# Altium PCB connecter.PcbDoc
Units mil, origin at the board's own origin, x right, y up, seen from the top; angles counter-clockwise.
Board outline 2514.83 x 777.95 mil, 2 copper layers (Top Layer, Bottom Layer); 18 components, 28 nets, 225 pads, 21 vias.
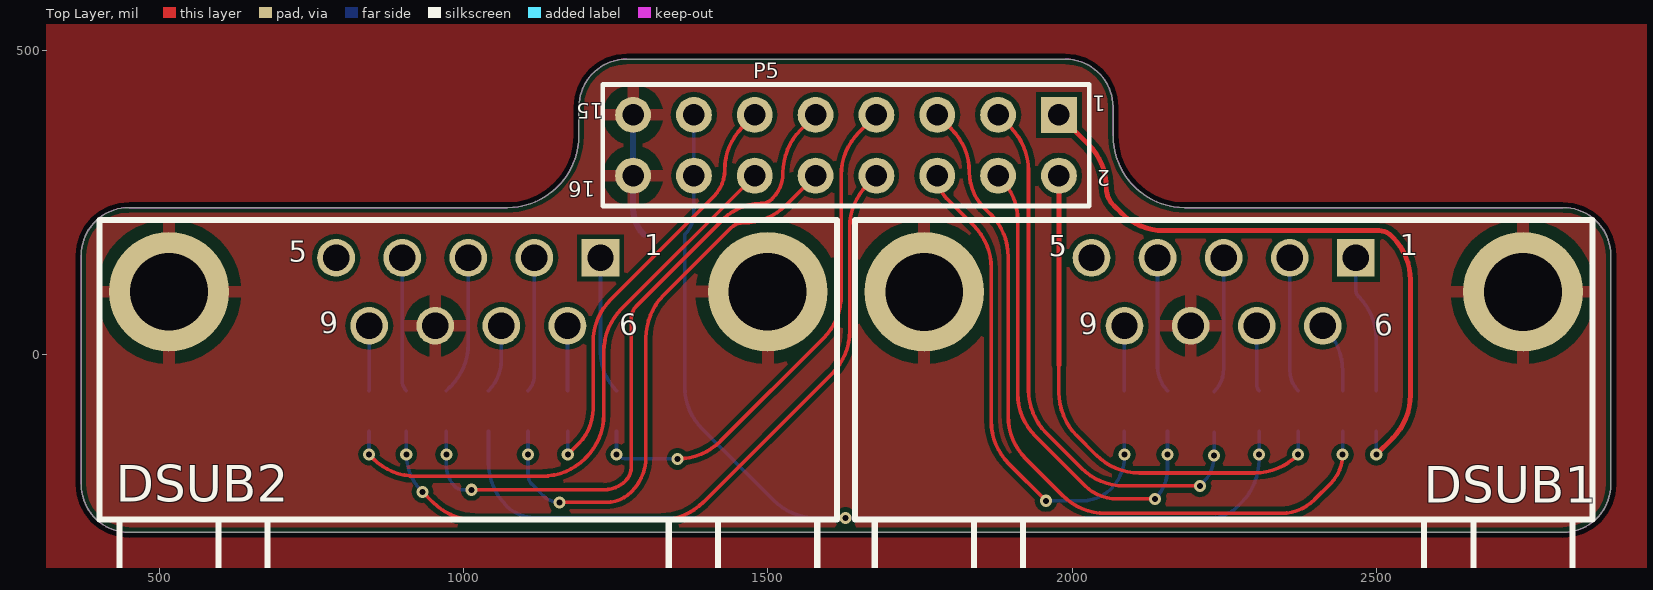
[diagram p0: Top Layer view]
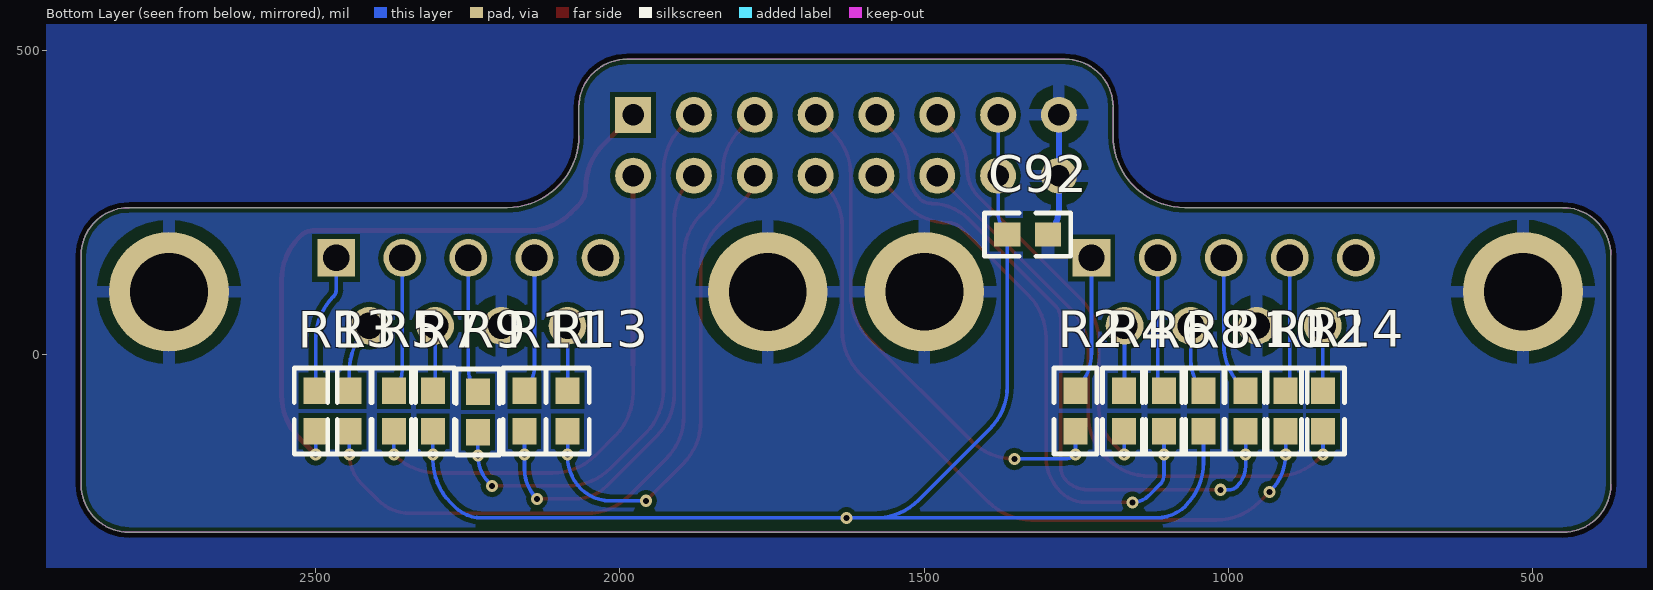
[diagram p1: Bottom Layer view, seen from below]

## Layer stack, top to bottom
Top Solder: solder mask 0.4, Solder Resist, Dk 3.5
Top Layer: signal copper 1.4
Dielectric1: dielectric 12.6, FR-4, Dk 4.8
Bottom Layer: signal copper 1.4
Bottom Solder: solder mask 0.4, Solder Resist, Dk 3.5

## Board outline
371.02,-213.78 ccw(c449.76,-213.78) 449.76,-292.52 2807.1,-292.52 ccw(c2807.1,-213.78) 2885.84,-213.78 2885.84,162.72 ccw(c2807.1,162.72) 2807.1,241.46 2185.6,241.46 cw(c2185.6,359.57) 2067.49,359.57 2067.49,406.69 ccw(c1988.75,406.69) 1988.75,485.43 1268.11,485.43 ccw(c1268.11,406.69) 1189.37,406.69 1189.37,359.57 cw(c1071.26,359.57) 1071.26,241.46 449.76,241.46 ccw(c449.76,162.72) 371.02,162.72

## Design rules (kind name [scope] priority, off if disabled: settings)
Clearance footprint [(HasFootprint('LQFP-32_L7.0-W7.0-P0.80-LS9.0-TL') OR HasFootprint('TF1') OR HasFootprint('LQFP64-10-05') OR HasFootprint('USB-C-16PIN'))] p1: gap=5
Clearance [All] p2: gap=8
ComponentClearance [All] p1: gap=0 collisioncheckmode=3 verticalgap=0 showdistances=FALSE
DiffPairsRouting [All] p1: maxlimit=10 minlimit=10 mostfreqgap=10 toplayer_minwidth=7 toplayer_maxwidth=15 toplayer_prefwidth=7 bottomlayer_minwidth=7 bottomlayer_maxwidth=15 bottomlayer_prefwidth=7 maxuncoupledlength=500
FabricationTestPointUsage TestPointUsage [All] p1: valid=0 allowmultiple=FALSE
FabricationTestpoint Testpoint [All] p1: side=3 testpointundercomponent=TRUE minsize=40 maxsize=100 preferedsize=60 minholesize=0 maxholesize=40 preferedholesize=32 testpointgrid=1 allowsidetop=TRUE allowsidebottom=TRUE usegrid=TRUE gridtolerance=0.01
HoleSize [All] p1: absolutevalues=TRUE maxlimit=157.48 minlimit=10 maxpercent=80.000 minpercent=20.000
PlaneClearance [All] p1: clearance=5
PlaneConnect [All] p1: planeconnectstyle=Relief reliefexpansion=3 reliefentries=4 reliefconductorwidth=20 reliefairgap=2
PolygonConnect [All] p1: connectstyle=Relief reliefconductorwidth=20 reliefentries=4 polygonreliefangle="90 Angle" airgapwidth=20
RoutingVias [All] p1: holewidth=11.81 width=23.62 viastyle="Through Hole" minholewidth=12 minwidth=24 maxholewidth=39.37 maxwidth=78.74
SilkToSilkClearance [All] p1: silktosilkclearance=0
SilkToSolderMaskClearance [IsPad] p1: minsilkscreentomaskgap=0 clearancetoexposedcopper=TRUE
SolderMaskExpansion [All] p1: expansion=4
Width [All] p1: maxlimit=118.11 minlimit=6 preferedwidth=8
21 further rules are at their usual default settings.

## Components (designator, comment, footprint, x,y, rotation, side; value= is the part's Value field where it differs from the comment)
C92 "0603" 0603 1363.17,196.8 r180 bottom
DSUB1 "DMR-9S" DSUB-TH_DMR-9S 2249.27,102.78 r270 top locked
DSUB2 "DMR-9S" DSUB-TH_DMR-9S 1007.5,102.92 r270 top locked
P5 "Header 8X2" HDR2X8 1978.43,393.77 r180 top locked
R1 "0603" 0603 2500.2,-59.62 r270 bottom
R2 "0603" 0603 1251.09,-59.62 r270 bottom
R3 "0603" 0603 2444.83,-59.62 r270 bottom
R4 "0603" 0603 1171.09,-59.62 r270 bottom
R5 "0603" 0603 2371.74,-59.62 r270 bottom
R6 "0603" 0603 1105.61,-59.62 r270 bottom
R7 "0603" 0603 2307.51,-59.62 r270 bottom
R8 "0603" 0603 1040.82,-59.62 r270 bottom
R9 "0603" 0603 2233.61,-61.19 r270 bottom
R10 "0603" 0603 971.48,-59.62 r270 bottom
R11 "0603" 0603 2156.91,-59.62 r270 bottom
R12 "0603" 0603 905.59,-59.62 r270 bottom
R13 "0603" 0603 2086.04,-59.62 r270 bottom
R14 "0603" 0603 844.34,-59.62 r270 bottom

## Footprints (in the part's own frame and the unit in brackets; to place one, negate y for a bottom-side part, rotate by r counter-clockwise, add the part's x,y. Pads: shape width x height; smd on the part's side, far side on the other; paste and mask are expansions set on the pad)
0603 [mm]
  rect 1.1x1 smd: 1(0,0) 2(1.7,0)
  silkscreen extent -0.95,-0.9 2.65,0.9
DSUB-TH_DMR-9S [mil]
  rect 62x62 hole 43.31: 1(-55.9,217.32)
  round 62 hole 43.31: 2(-55.9,108.66) 3(-55.9,0) 4(-55.9,-108.66) 5(-55.9,-217.32) 6(55.9,162.99) 7(55.9,54.33) 8(55.9,-54.33) 9(55.9,-162.99)
  round 196.85 hole 127.95: 10(-0.01,492.12) 11(-0.01,-492.12)
  silkscreen extent -118,-606 610,606
HDR2X8 [mm] "Connector; Header; 8x2 Position"
  rect 1.5x1.5 hole 0.9: 1(0,0)
  round 1.5 hole 0.9: 2(0,2.54) 3(2.54,0) 4(2.54,2.54) 5(5.08,0) 6(5.08,2.54) 7(7.62,0) 8(7.62,2.54) 9(10.16,0) 10(10.16,2.54) 11(12.7,0) 12(12.7,2.54) 13(15.24,0) 14(15.24,2.54) 15(17.78,0) 16(17.78,2.54)
  silkscreen extent -1.27,-1.27 19.05,3.81

## Part data
C92: library part CAP_0603, "0603 footprint non-polorised capacitor"
P5: "Header, 8-Pin, Dual row"
R1 R2 R3 R4 R5 R6 R7 R8 R9 R10 R11 R12 R13 R14: library part RES_0603, "0603 footprint resistor"

## Free pads (board coordinates)
  round 60.04 on Mech4: 1(515.41,72.97) 1(515.41,133.01) 1(1499.66,72.97) 1(1499.66,133.01) 1(1757.2,72.97) 1(1757.2,133.01) 1(2741.45,72.97) 1(2741.45,133.01)
  round 127.95 on Mech14: 1(515.41,102.99) 1(1499.66,102.99) 1(1757.2,102.99) 1(2741.45,102.99)
  round 196.85 on Mech2: 1(515.41,102.99) 1(1499.66,102.99) 1(1757.2,102.99) 1(2741.45,102.99)
  round 196.85 on Mech3: 1(515.41,102.99) 1(1499.66,102.99) 1(1757.2,102.99) 1(2741.45,102.99)
  round 204.85 on Mech16: 1(515.41,102.99) 1(515.41,102.99) 1(1499.66,102.99) 1(1499.66,102.99) 1(1757.2,102.99) 1(1757.2,102.99) 1(2741.45,102.99) 1(2741.45,102.99)
  round 196.85 on Mech15: 1(515.41,102.99) 1(1499.66,102.99) 1(1757.2,102.99) 1(2741.45,102.99)
  round 120.08 on Mech4: 1(515.41,102.99) 1(1499.66,102.99) 1(1757.2,102.99) 1(2741.45,102.99)
  round 43.31 on Mech14: 1(790.21,158.89) 1(844.54,47.08) 1(898.87,158.89) 1(953.2,47.08) 1(1007.53,158.89) 1(1061.86,47.08) 1(1116.19,158.89) 1(1170.52,47.08) 1(1224.85,158.89) 1(2032,158.89) 1(2086.33,47.08) 1(2140.66,158.89) 1(2194.99,47.08) 1(2249.32,158.89) 1(2303.65,47.08) 1(2357.98,158.89) 1(2412.31,47.08) 1(2466.64,158.89)
  round 62 on Mech2: 1(790.21,158.89) 1(844.54,47.08) 1(898.87,158.89) 1(953.2,47.08) 1(1007.53,158.89) 1(1061.86,47.08) 1(1116.19,158.89) 1(1170.52,47.08) 1(2032,158.89) 1(2086.33,47.08) 1(2140.66,158.89) 1(2194.99,47.08) 1(2249.32,158.89) 1(2303.65,47.08) 1(2357.98,158.89) 1(2412.31,47.08)
  round 62 on Mech3: 1(790.21,158.89) 1(844.54,47.08) 1(898.87,158.89) 1(953.2,47.08) 1(1007.53,158.89) 1(1061.86,47.08) 1(1116.19,158.89) 1(1170.52,47.08) 1(2032,158.89) 1(2086.33,47.08) 1(2140.66,158.89) 1(2194.99,47.08) 1(2249.32,158.89) 1(2303.65,47.08) 1(2357.98,158.89) 1(2412.31,47.08)
  round 70 on Mech16: 1(790.21,158.89) 1(790.21,158.89) 1(844.54,47.08) 1(844.54,47.08) 1(898.87,158.89) 1(898.87,158.89) 1(953.2,47.08) 1(953.2,47.08) 1(1007.53,158.89) 1(1007.53,158.89) 1(1061.86,47.08) 1(1061.86,47.08) 1(1116.19,158.89) 1(1116.19,158.89) 1(1170.52,47.08) 1(1170.52,47.08) 1(2032,158.89) 1(2032,158.89) 1(2086.33,47.08) 1(2086.33,47.08) 1(2140.66,158.89) 1(2140.66,158.89) 1(2194.99,47.08) 1(2194.99,47.08) 1(2249.32,158.89) 1(2249.32,158.89) 1(2303.65,47.08) 1(2303.65,47.08) 1(2357.98,158.89) 1(2357.98,158.89) 1(2412.31,47.08) 1(2412.31,47.08)
  round 62 on Mech15: 1(790.21,158.89) 1(844.54,47.08) 1(898.87,158.89) 1(953.2,47.08) 1(1007.53,158.89) 1(1061.86,47.08) 1(1116.19,158.89) 1(1170.52,47.08) 1(2032,158.89) 1(2086.33,47.08) 1(2140.66,158.89) 1(2194.99,47.08) 1(2249.32,158.89) 1(2303.65,47.08) 1(2357.98,158.89) 1(2412.31,47.08)
  round 35.44 on Mech4: 1(790.21,158.89) 1(844.54,47.08) 1(898.87,158.89) 1(953.2,47.08) 1(1007.53,158.89) 1(1061.86,47.08) 1(1116.19,158.89) 1(1170.52,47.08) 1(1224.85,158.89) 1(2032,158.89) 1(2086.33,47.08) 1(2140.66,158.89) 1(2194.99,47.08) 1(2249.32,158.89) 1(2303.65,47.08) 1(2357.98,158.89) 1(2412.31,47.08) 1(2466.64,158.89)
  round 2.36 on Mech5: 1(1618.83,224.92) 1(1618.83,227.28) 1(2860.62,224.92) 1(2860.62,227.28)
  round 0.5 on Mech14: 1(1894.85,-41.38)

## Via types
v1: diameter 20, hole 10, Top Layer to Bottom Layer, 21 vias

## Nets (pads, with @x,y where several pads share a name; then routed paths per layer and width w, separated by ;. In a path a pad name is that pad's centre, name@x,y a point inside that pad or via, vN(x,y) a via of type N, cw(c..) or ccw(c..) an arc to the next point about the centre after c; other vN are vias at no path point)
GND: C92.2 DSUB1.8 DSUB1.10 DSUB1.11 DSUB2.8 DSUB2.10 DSUB2.11 P5.15 P5.16 | length 201.7
  Bottom Layer w10: P5.15 P5.16 1278.43,239.79 ccw(c1339.23,239.79) C92.2
JOY0_BTN1: P5.11 R4.2 | length 710
  Top Layer w6: v1(1171.09,-164.53) 1188.73,-146.89 ccw(c1130.98,-89.14) 1212.65,-89.14 1212.65,19.98 cw(c1312.65,19.98) 1241.94,90.69 1411.32,260.06 ccw(c1368.34,303.04) 1429.12,303.04 cw(c1529.12,303.04) 1458.41,373.75 P5.11
  Bottom Layer w6: v1@1170.65,-165.59 ccw(c1169.6,-164.53) v1(1171.09,-164.53) R4.2
JOY0_BTN2: P5.12 R14.2 | length 983.1
  Top Layer w6: v1(844.34,-164.53) 850.79,-170.97 ccw(c921.5,-100.26) 921.5,-200.26 1128.8,-200.26 ccw(c1128.8,-100.26) 1199.51,-170.97 1200.95,-169.54 ccw(c1130.24,-98.83) 1230.24,-98.83 1230.24,4.16 cw(c1330.24,4.16) 1259.52,74.87 P5.12
  Bottom Layer w6: v1(844.34,-164.53) R14.2
JOY0_DOWN: P5.10 R6.2 | length 930.8
  Top Layer w6: v1(1157.46,-243.27) 1233.97,-243.27 ccw(c1233.97,-184.27) 1275.69,-225.99 ccw(c1218.17,-168.47) 1299.51,-168.47 1299.51,26.86 cw(c1399.51,26.86) 1328.8,97.57 1439.03,207.79 cw(c1459.52,187.3) 1459.52,216.28 ccw(c1459.52,316.28) 1530.23,245.57 P5.10
  Bottom Layer w6: R6.2 v1(1105.61,-164.53) 1105.61,-198.43 ccw(c1126.47,-198.43) 1111.72,-213.19 1130.73,-232.2 ccw(c1157.46,-205.47) v1(1157.46,-243.27)
JOY0_LEFT: P5.9 R10.2 | length 1124.4
  Top Layer w6: v1(1012.85,-222.59) 1013.18,-222.27 1166.16,-222.27 1166.48,-222.59 1230.17,-222.59 ccw(c1230.17,-171.56) 1266.25,-207.65 ccw(c1244.12,-185.51) 1275.42,-185.51 1275.42,58.92 cw(c1304.49,58.92) 1283.93,79.48 1427.04,222.59 cw(c1488.46,161.17) 1488.46,248.03 ccw(c1488.46,274.13) 1506.92,255.67 ccw(c1463.96,298.64) 1524.72,298.64 cw(c1624.72,298.64) 1554.01,369.35 P5.9
  Bottom Layer w6: R10.2 v1(971.48,-164.53) 971.48,-182.89 ccw(c1019.9,-182.89) 985.66,-217.12 ccw(c998.86,-203.93) 998.86,-222.59 v1(1012.85,-222.59)
JOY0_RIGHT: P5.8 R12.2 | length 1237.2
  Top Layer w6: v1(932.17,-225.94) 949.09,-242.86 ccw(c1019.81,-172.15) 975.55,-261.82 ccw(c1019.81,-172.15) 980.89,-264.27 ccw(c1019.81,-172.15) 1019.81,-272.15 1323.37,-272.15 ccw(c1323.37,-172.15) 1394.08,-242.86 1605.29,-31.65 ccw(c1534.58,39.06) 1634.58,39.06 1634.58,208.5 cw(c1734.58,208.5) 1663.87,279.21 P5.8
  Bottom Layer w6: R12.2 v1(905.59,-164.53) ccw(c989.66,-164.53) 930.21,-223.98 v1(932.17,-225.94)
JOY0_UP: P5.7 R2.2 | length 852.6
  Top Layer w6: v1(1351.57,-171.7) ccw(c1351.57,-71.7) 1422.28,-142.41 1591.29,26.6 ccw(c1520.58,97.31) 1620.58,97.31 1620.58,294.5 cw(c1720.58,294.5) 1649.87,365.21 P5.7
  Bottom Layer w6: R2.2 v1(1251.09,-164.53) ccw(c1268.39,-147.22) 1268.39,-171.7 v1(1351.57,-171.7)
JOY1_BTN1: P5.5 R3.2 | length 1251.1
  Top Layer w6: P5.5 1801.81,370.39 cw(c1731.1,299.68) 1831.1,299.68 ccw(c1913.67,299.68) 1855.28,241.29 1865.72,230.86 cw(c1795.01,160.15) 1895.01,160.15 1895.01,-101.15 ccw(c1995.01,-101.15) 1924.3,-171.86 1984.45,-232.02 ccw(c2055.16,-161.31) 2055.16,-261.31 2344.05,-261.31 ccw(c2344.05,-183.92) 2398.78,-238.64 ; 2398.77,-238.64 2424.99,-212.43 ccw(c2377.09,-164.53) v1(2444.83,-164.53)
  Bottom Layer w6: v1(2444.83,-164.53) R3.2
JOY1_BTN2: P5.6 R13.2 | length 810.2
  Top Layer w6: P5.6 ccw(c1831.39,293.77) 1793.94,256.32 1837.93,212.33 cw(c1767.22,141.62) 1867.22,141.62 1867.22,-109.38 ccw(c1967.22,-109.38) 1896.51,-180.09 v1(1957.13,-240.72)
  Bottom Layer w6: v1(1957.13,-240.72) 2016.2,-240.72 ccw(c2016.2,-172.57) 2064.39,-220.76 ccw(c2012.11,-168.48) 2086.04,-168.48 v1(2086.04,-164.53) R13.2
JOY1_DOWN: P5.2 R5.2 | length 866.4
  Top Layer w6: 1978.43,-17.95 1978.43,-62.73 ccw(c2078.43,-62.73) 2007.72,-133.44 2039.85,-165.57 ccw(c2110.56,-94.85) 2110.56,-194.85 2300,-194.85 ccw(c2300,-94.85) 2370.71,-165.57 v1(2371.74,-164.53)
  Top Layer w8: 1978.43,-17.95 P5.2
  Bottom Layer w6: v1(2371.74,-164.53) R5.2
JOY1_LEFT: P5.3 R9.2 | length 926.4
  Top Layer w6: P5.3 1899.06,373.14 cw(c1828.35,302.43) 1928.35,302.43 1928.35,-58.51 ccw(c2028.35,-58.51) 1957.64,-129.22 2015.26,-186.84 ccw(c2085.97,-116.13) 2085.97,-216.13 v1(2210.22,-216.13)
  Bottom Layer w6: v1(2210.22,-216.13) 2214.77,-211.57 ccw(c2169.29,-166.09) v1(2233.61,-166.09) R9.2
JOY1_RIGHT: P5.4 R11.2 | length 797.5
  Top Layer w6: P5.4 1881.46,290.74 cw(c1810.75,220.03) 1910.75,220.03 1910.75,-63.97 ccw(c2010.75,-63.97) 1940.04,-134.68 2020.6,-215.24 ccw(c2074.38,-161.45) 2074.38,-237.51 v1(2136.48,-237.51)
  Bottom Layer w6: v1(2136.48,-237.51) ccw(c2087.15,-188.18) 2156.91,-188.18 v1(2156.91,-164.53) R11.2
JOY1_UP: P5.1 R1.2 | length 1076.8
  Top Layer w8: P5.1 2026.88,345.32 cw(c1956.17,274.61) 2056.17,274.61 ccw(c2098.34,274.61) 2068.52,244.79 2080.6,232.71 ccw(c2151.31,303.42) 2151.31,203.42 2504.71,203.42 cw(c2504.71,174.96) 2524.84,195.08 2527.04,192.88 cw(c2456.33,122.17) 2556.33,122.17 2556.33,-66.98 cw(c2456.33,-66.98) 2527.04,-137.69 v1(2500.2,-164.53)
  Bottom Layer w6: v1(2500.2,-164.53) R1.2
NetDSUB1_1: DSUB1.1 R1.1 | length 227.3
  Bottom Layer w6: DSUB1.1 2466.59,105.52 ccw(c2480.88,105.52) 2470.78,95.42 2470.91,95.29 cw(c2400.2,24.58) 2500.2,24.58 R1.1
NetDSUB1_2: DSUB1.2 R5.1 | length 222
  Bottom Layer w6: DSUB1.2 2357.93,-26.28 ccw(c2405.08,-26.28) R5.1
NetDSUB1_3: DSUB1.3 R9.1 | length 224.1
  Bottom Layer w6: R9.1 ccw(c2195.8,-23.38) 2249.27,-23.38 DSUB1.3
NetDSUB1_4: DSUB1.4 R11.1 | length 222.7
  Bottom Layer w6: DSUB1.4 2140.61,-20.27 ccw(c2196.27,-20.27) R11.1
NetDSUB1_6: DSUB1.6 R3.1 | length 115.7
  Bottom Layer w6: DSUB1.6 2415.54,43.6 cw(c2344.83,-27.11) 2444.83,-27.11 R3.1
NetDSUB1_7: DSUB1.7 R7.1 | length 107.5
  Bottom Layer w6: DSUB1.7 2303.6,-50.18 ccw(c2316.96,-50.18) R7.1
NetDSUB1_9: DSUB1.9 R13.1 | length 106.6
  Bottom Layer w6: R13.1 2086.04,46.63 DSUB1.9
NetDSUB2_1: DSUB2.1 R2.1 | length 225.5
  Bottom Layer w6: DSUB2.1 1224.81,3.8 ccw(c1314.51,3.8) R2.1
NetDSUB2_2: DSUB2.2 R6.1 | length 221.3
  Bottom Layer w6: R6.1 ccw(c1080.15,-34.16) 1116.15,-34.16 DSUB2.2
NetDSUB2_3: DSUB2.3 R10.1 | length 229.1
  Bottom Layer w6: R10.1 978.2,-52.9 ccw(c907.49,17.81) 1007.49,17.81 DSUB2.3
NetDSUB2_4: DSUB2.4 R12.1 | length 220.3
  Bottom Layer w6: DSUB2.4 898.83,-43.32 ccw(c921.89,-43.32) R12.1
NetDSUB2_6: DSUB2.6 R4.1 | length 106.8
  Bottom Layer w6: DSUB2.6 1170.48,-58.15 ccw(c1172.56,-58.15) R4.1
NetDSUB2_7: DSUB2.7 R8.1 | length 112.3
  Bottom Layer w6: R8.1 ccw(c990.12,-8.92) 1061.82,-8.92 DSUB2.7
NetDSUB2_9: DSUB2.9 R14.1 | length 106.7
  Bottom Layer w6: R14.1 844.5,-59.46 DSUB2.9
VCC3V3: C92.1 P5.13 P5.14 R7.2 R8.2 | length 2248.4
  Bottom Layer w6: R8.2 1040.82,-178.25 ccw(c1140.82,-178.25) 1070.11,-248.96 ccw(c1117.88,-201.2) 1117.88,-268.75 1579.57,-268.75 ; P5.13 P5.14 1378.43,233.64 cw(c1326.32,233.64) C92.1 1363.17,-52.35 ccw(c1463.17,-52.35) 1392.46,-123.06 1508.86,-239.46 ccw(c1579.57,-168.75) 1579.57,-268.75 ; R7.2 v1(2307.51,-164.53) 2307.51,-173.27 cw(c2207.51,-173.27) 2278.22,-243.98 2271.82,-250.39 cw(c2227.49,-206.06) 2227.49,-268.75 1579.57,-268.75
  other v1: 1627.76,-268.83
pads on no net: DSUB1.5 DSUB2.5

## Polygon pours and split planes (outlines as drawn)
GND on Bottom Layer "Bottom Layer-No Net" (solid, pour order 80): 196.74,690.71 2870.72,690.71 cw(c2870.72,590.71) 2941.43,661.42 3247.25,355.61 cw(c3208.72,317.08) 3263.21,317.08 3263.21,-689.6 235.5,-689.6 cw(c235.5,-589.6) 164.79,-660.31 74.4,-569.92
GND on Top Layer "Bottom Layer-No Net" (solid, pour order 82): 210.52,791.93 ccw(c241.59,823.01) 241.59,779.06 3068.15,779.06 3100.75,779.06 cw(c3100.75,679.06) 3171.46,749.77 3686.02,235.21 3727.53,193.7 cw(c3656.82,122.99) 3756.82,122.99 3756.82,-887.9 -44.12,-887.9 cw(c-44.12,-787.9) -114.84,-858.61 -297.94,-675.5

## Keep-outs
Keep-Out Layer:
  lines w0.5: 371.02,-213.78 ccw(c449.76,-213.78) 449.76,-292.52 1628.43,-292.52 2807.1,-292.52 ccw(c2807.1,-213.78) 2885.84,-213.78 2885.84,162.72 ccw(c2807.1,162.72) 2807.1,241.46 2264.34,241.46 2185.6,241.46 cw(c2185.6,359.57) 2067.49,359.57 2067.49,406.69 ccw(c1988.75,406.69) 1988.75,485.43 1628.43,485.43 1268.11,485.43 ccw(c1268.11,406.69) 1189.37,406.69 1189.37,359.57 cw(c1071.26,359.57) 1071.26,241.46 992.52,241.46 449.76,241.46 ccw(c449.76,162.72) 371.02,162.72 371.02,-213.78

## Silkscreen, mask and mechanical layers (free items; w line width, h text height)
Mechanical 2:
  region: 1193.85,127.89 1193.85,189.89 1255.85,189.89 1255.85,127.89
  region: 2435.64,127.89 2435.64,189.89 2497.64,189.89 2497.64,127.89
  region: 1948.9,423.3 2007.96,423.3 2007.96,364.24 1948.9,364.24
Mechanical 3:
  region: 1193.85,127.89 1193.85,189.89 1255.85,189.89 1255.85,127.89
  region: 2435.64,127.89 2435.64,189.89 2497.64,189.89 2497.64,127.89
  region: 1948.9,423.3 2007.96,423.3 2007.96,364.24 1948.9,364.24
Mechanical 4:
  lines w0.5: 396.23,-512.25 396.23,226.09 1618.83,226.09 1618.83,-512.25 396.23,-512.25 ; 1638.03,-512.25 1638.03,226.09 2860.63,226.09 2860.63,-512.25 1638.03,-512.25
  lines w8.86: 790.21,145.6 ccw(c790.21,150.03) 790.21,154.46 ccw(c790.21,150.03) 790.21,145.6 ; 790.21,163.32 ccw(c790.21,167.75) 790.21,172.18 ccw(c790.21,167.75) 790.21,163.32 ; 844.54,33.79 ccw(c844.54,38.22) 844.54,42.65 ccw(c844.54,38.22) 844.54,33.79 ; 844.54,51.51 ccw(c844.54,55.94) 844.54,60.37 ccw(c844.54,55.94) 844.54,51.51 ; 898.87,145.6 ccw(c898.87,150.03) 898.87,154.46 ccw(c898.87,150.03) 898.87,145.6 ; 898.87,163.32 ccw(c898.87,167.75) 898.87,172.18 ccw(c898.87,167.75) 898.87,163.32 ; 953.2,33.79 ccw(c953.2,38.22) 953.2,42.65 ccw(c953.2,38.22) 953.2,33.79 ; 953.2,51.51 ccw(c953.2,55.94) 953.2,60.37 ccw(c953.2,55.94) 953.2,51.51 ; 1007.53,145.6 ccw(c1007.53,150.03) 1007.53,154.46 ccw(c1007.53,150.03) 1007.53,145.6 ; 1007.53,163.32 ccw(c1007.53,167.75) 1007.53,172.18 ccw(c1007.53,167.75) 1007.53,163.32 ; 1061.86,33.79 ccw(c1061.86,38.22) 1061.86,42.65 ccw(c1061.86,38.22) 1061.86,33.79 ; 1061.86,51.51 ccw(c1061.86,55.94) 1061.86,60.37 ccw(c1061.86,55.94) 1061.86,51.51 ; 1116.19,145.6 ccw(c1116.19,150.03) 1116.19,154.46 ccw(c1116.19,150.03) 1116.19,145.6 ; 1116.19,163.32 ccw(c1116.19,167.75) 1116.19,172.18 ccw(c1116.19,167.75) 1116.19,163.32 ; 1170.52,33.79 ccw(c1170.52,38.22) 1170.52,42.65 ccw(c1170.52,38.22) 1170.52,33.79 ; 1170.52,51.51 ccw(c1170.52,55.94) 1170.52,60.37 ccw(c1170.52,55.94) 1170.52,51.51 ; 1224.85,145.6 ccw(c1224.85,150.03) 1224.85,154.46 ccw(c1224.85,150.03) 1224.85,145.6 ; 1224.85,163.32 ccw(c1224.85,167.75) 1224.85,172.18 ccw(c1224.85,167.75) 1224.85,163.32 ; 2032,145.6 ccw(c2032,150.03) 2032,154.46 ccw(c2032,150.03) 2032,145.6 ; 2032,163.32 ccw(c2032,167.75) 2032,172.18 ccw(c2032,167.75) 2032,163.32 ; 2086.33,33.79 ccw(c2086.33,38.22) 2086.33,42.65 ccw(c2086.33,38.22) 2086.33,33.79 ; 2086.33,51.51 ccw(c2086.33,55.94) 2086.33,60.37 ccw(c2086.33,55.94) 2086.33,51.51 ; 2140.66,145.6 ccw(c2140.66,150.03) 2140.66,154.46 ccw(c2140.66,150.03) 2140.66,145.6 ; 2140.66,163.32 ccw(c2140.66,167.75) 2140.66,172.18 ccw(c2140.66,167.75) 2140.66,163.32 ; 2194.99,33.79 ccw(c2194.99,38.22) 2194.99,42.65 ccw(c2194.99,38.22) 2194.99,33.79 ; 2194.99,51.51 ccw(c2194.99,55.94) 2194.99,60.37 ccw(c2194.99,55.94) 2194.99,51.51 ; 2249.32,145.6 ccw(c2249.32,150.03) 2249.32,154.46 ccw(c2249.32,150.03) 2249.32,145.6 ; 2249.32,163.32 ccw(c2249.32,167.75) 2249.32,172.18 ccw(c2249.32,167.75) 2249.32,163.32 ; 2303.65,33.79 ccw(c2303.65,38.22) 2303.65,42.65 ccw(c2303.65,38.22) 2303.65,33.79 ; 2303.65,51.51 ccw(c2303.65,55.94) 2303.65,60.37 ccw(c2303.65,55.94) 2303.65,51.51 ; 2357.98,145.6 ccw(c2357.98,150.03) 2357.98,154.46 ccw(c2357.98,150.03) 2357.98,145.6 ; 2357.98,163.32 ccw(c2357.98,167.75) 2357.98,172.18 ccw(c2357.98,167.75) 2357.98,163.32 ; 2412.31,33.79 ccw(c2412.31,38.22) 2412.31,42.65 ccw(c2412.31,38.22) 2412.31,33.79 ; 2412.31,51.51 ccw(c2412.31,55.94) 2412.31,60.37 ccw(c2412.31,55.94) 2412.31,51.51 ; 2466.64,145.6 ccw(c2466.64,150.03) 2466.64,154.46 ccw(c2466.64,150.03) 2466.64,145.6 ; 2466.64,163.32 ccw(c2466.64,167.75) 2466.64,172.18 ccw(c2466.64,167.75) 2466.64,163.32
Mechanical 5:
  lines w2.36: 1618.83,224.92 cw(c1618.83,226.1) 1618.83,227.28 cw(c1618.83,226.1) 1618.83,224.92 ; 2860.62,224.92 cw(c2860.62,226.1) 2860.62,227.28 cw(c2860.62,226.1) 2860.62,224.92
Mechanical 15:
  region: 1193.85,127.89 1193.85,189.89 1255.85,189.89 1255.85,127.89
  region: 2435.64,127.89 2435.64,189.89 2497.64,189.89 2497.64,127.89
  region: 1948.9,423.3 2007.96,423.3 2007.96,364.24 1948.9,364.24
Mechanical 17:
  region: 1189.85,123.89 1189.85,193.89 1259.85,193.89 1259.85,123.89
  region: 2431.64,123.89 2431.64,193.89 2501.64,193.89 2501.64,123.89
  region: 1944.9,427.3 2011.96,427.3 2011.96,360.24 1944.9,360.24
Mechanical 18:
  region: 1189.85,123.89 1189.85,193.89 1259.85,193.89 1259.85,123.89
  region: 2431.64,123.89 2431.64,193.89 2501.64,193.89 2501.64,123.89
  region: 1944.9,427.3 2011.96,427.3 2011.96,360.24 1944.9,360.24

## Text inside footprints (layer, text, board x,y; h text height)
DSUB1: Top Overlay "1" at 2538.59,163.18 h35; Top Overlay "5" at 1961.82,161.34 h35; Top Overlay "9" at 2013.44,32.3 h35 r5; Top Overlay "6" at 2498.84,30.23 h35 r5
DSUB2: Top Overlay "1" at 1296.81,163.33 h35; Top Overlay "5" at 711.97,152.45 h35; Top Overlay "9" at 765.16,34.25 h35 r5; Top Overlay "6" at 1257.06,30.38 h35 r5
P5: Top Overlay "2" at 2062.99,302.8 h25 r180; Top Overlay "1" at 2055.09,425.18 h25 r180; Top Overlay "15" at 1229,412.87 h25 r180; Top Overlay "16" at 1216.33,284.7 h25 r180